# Altium PCB Smart Dustbin.PcbDoc
Units mm, origin at the board's own origin, x right, y up, seen from the top; angles counter-clockwise.
Board outline 56 x 49 mm, 2 copper layers (Top Layer, Bottom Layer), stack 1.1 mm thick; 14 components, 16 nets, 61 pads, 4 vias.
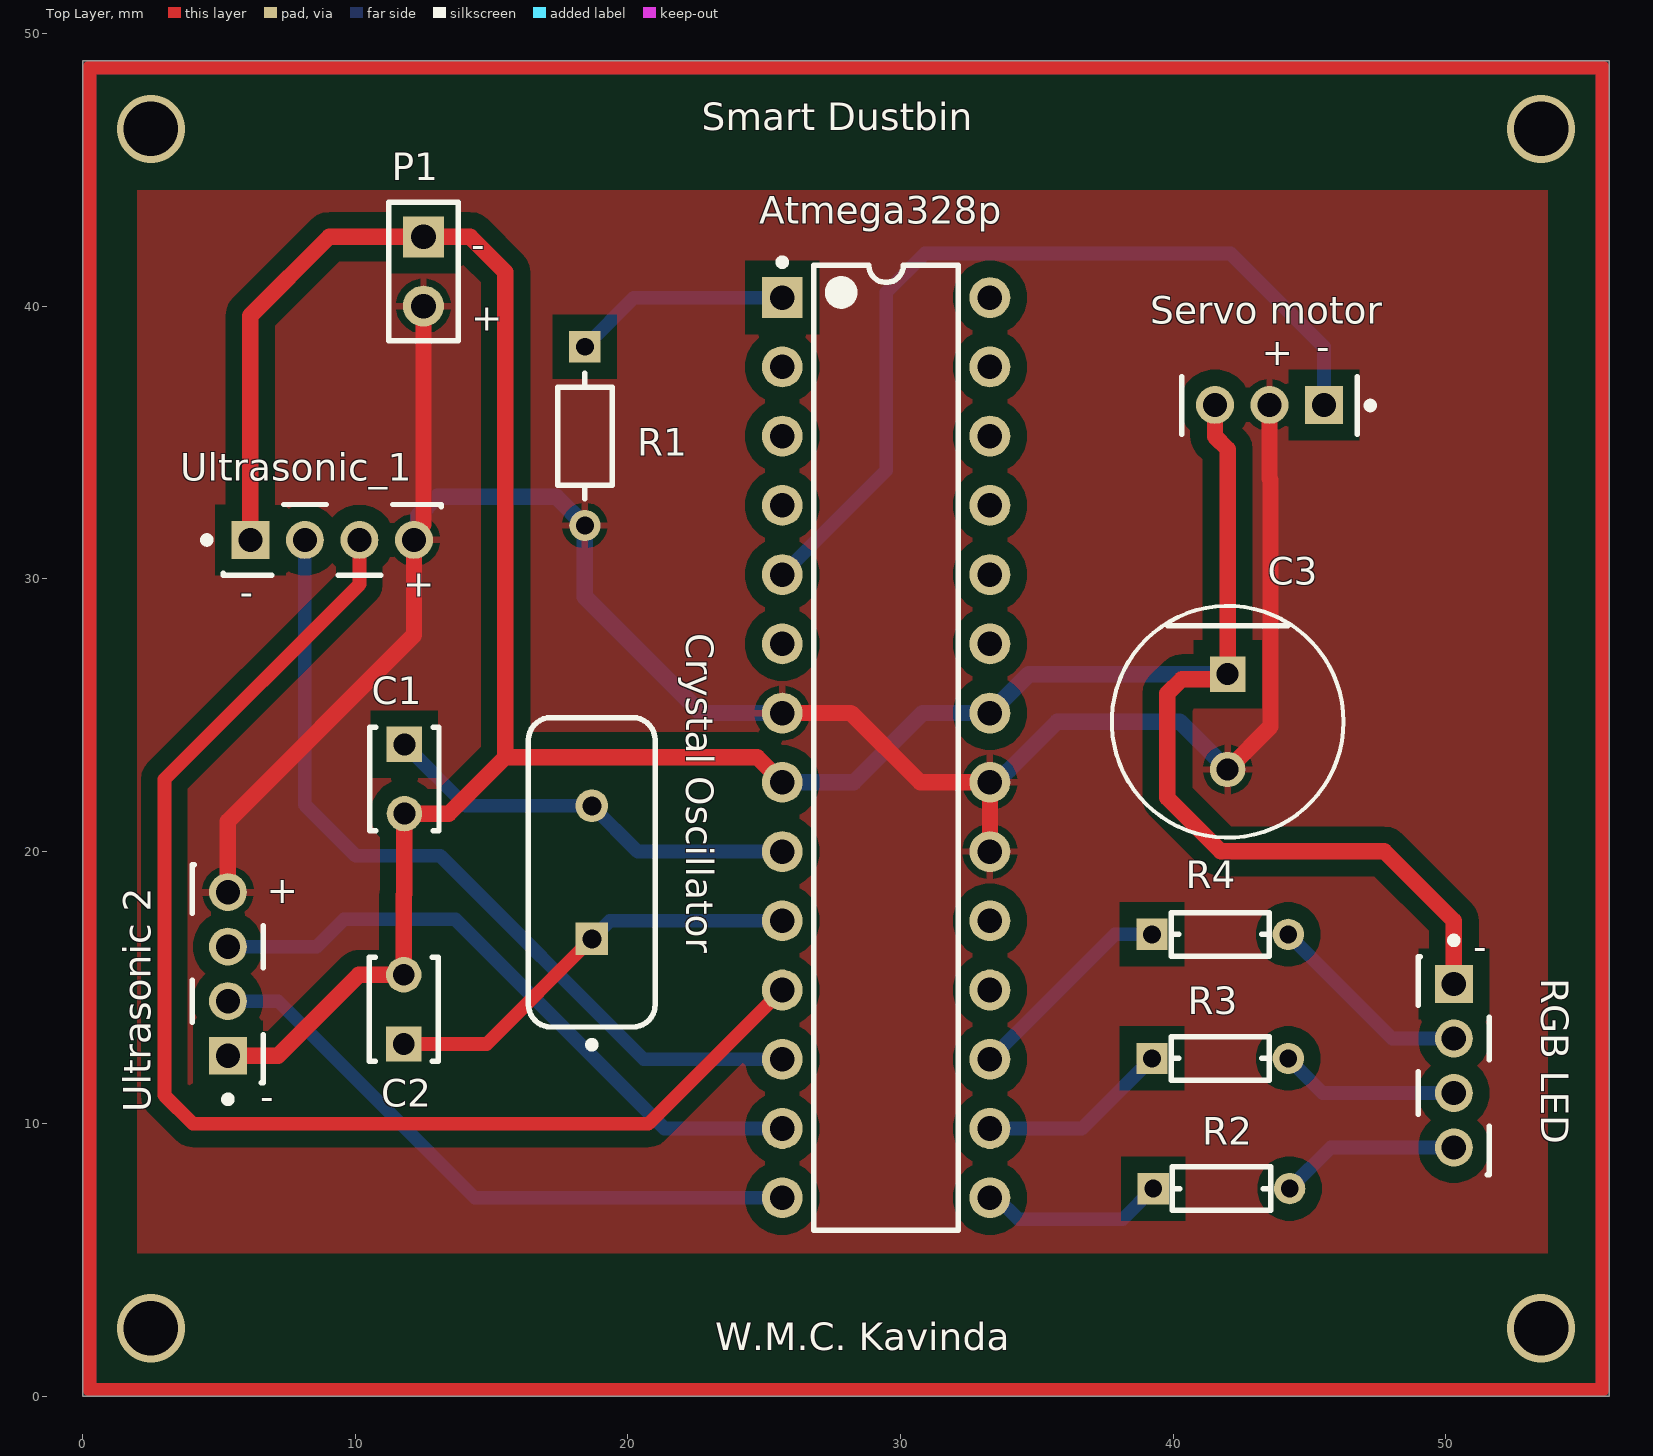
[diagram p0: Top Layer view]
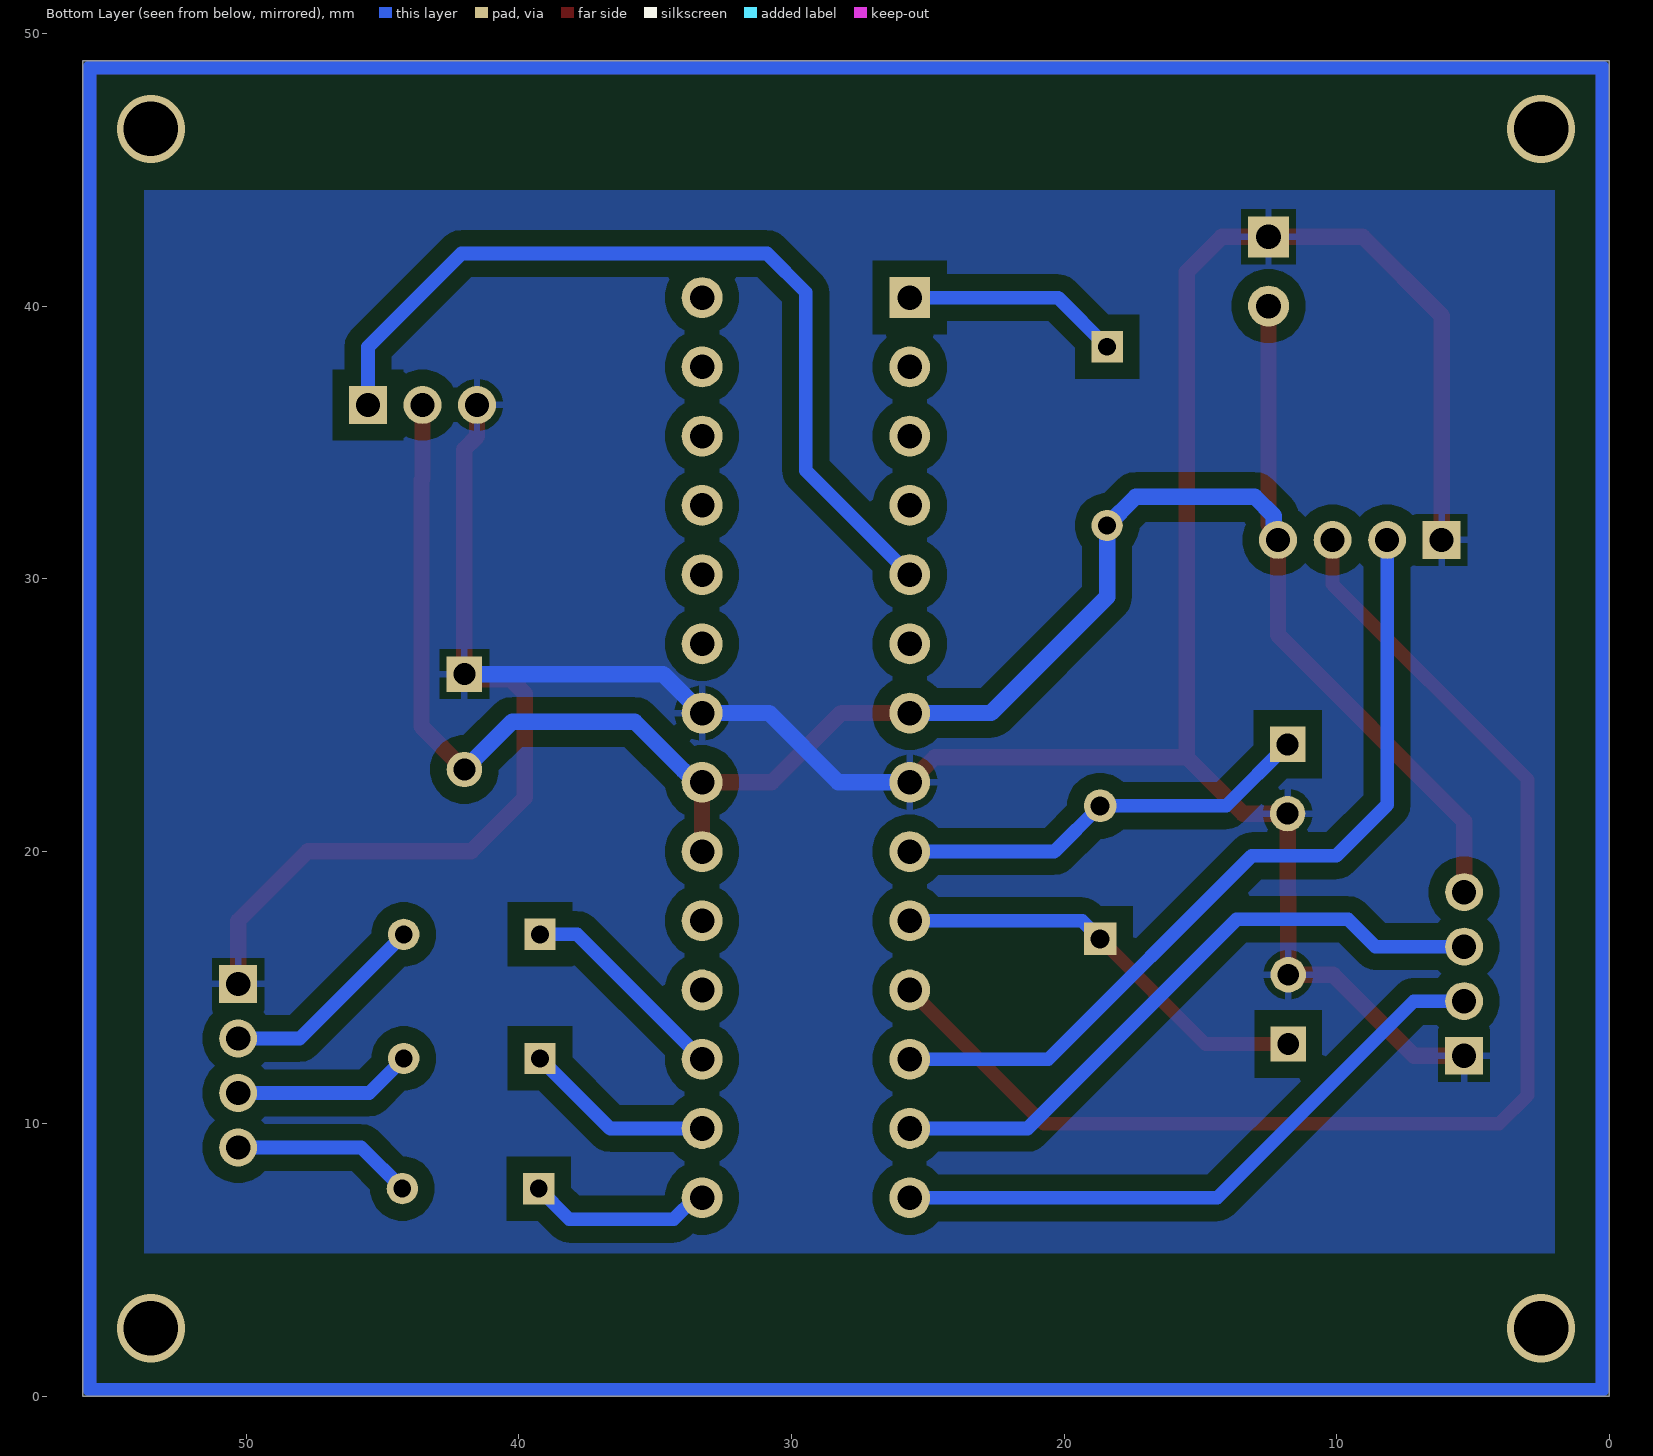
[diagram p1: Bottom Layer view, seen from below]
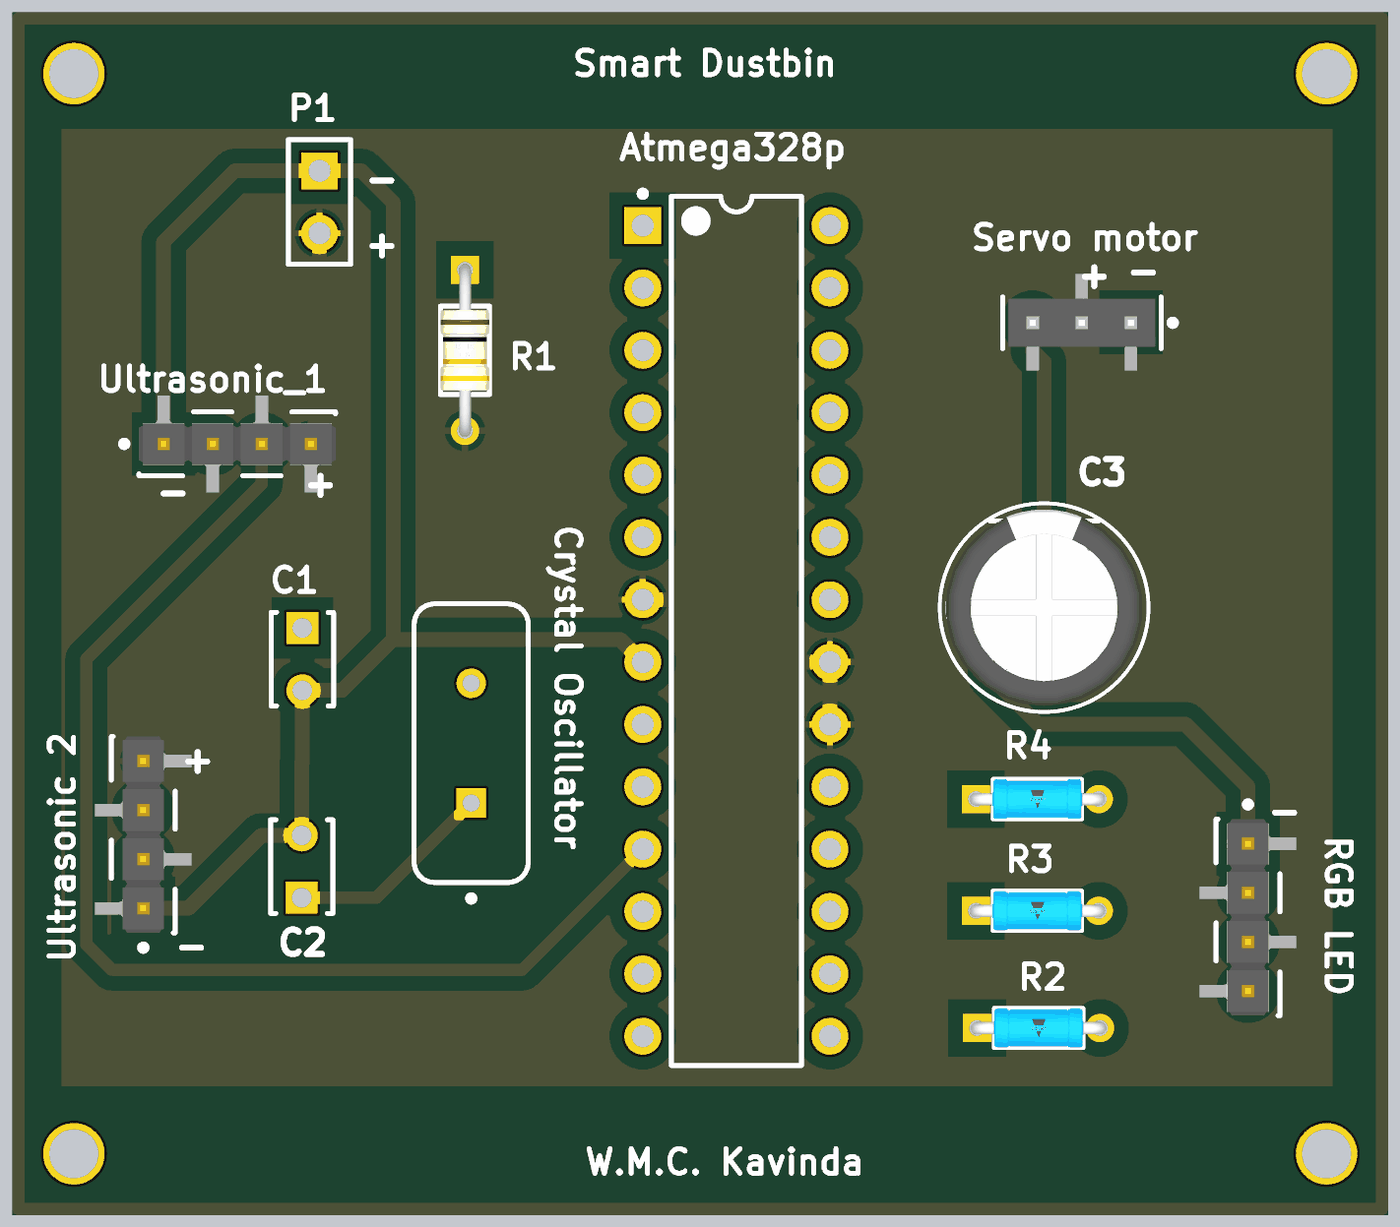
[diagram p2: 3D render of the assembled board from above, using the file's embedded part models]

## Layer stack, top to bottom
Top Solder: solder mask 0.05, SM-001, Dk 4
Top Layer: signal copper 0.1
Dielectric 1: dielectric 0.9, FR-4, Dk 4.8
Bottom Layer: signal copper 0.1
Bottom Solder: solder mask 0.05, SM-001, Dk 4

## Board outline
0,0 56,0 56,49 0,49

## Design rules (kind name [scope] priority, off if disabled: settings)
Clearance [All] p1: gap=0.6 ignorepadtopadclearanceinfootprint=FALSE
PolygonConnect [All] p1: connectstyle=Relief reliefconductorwidth=0.254 reliefentries=4 polygonreliefangle="90 Angle" airgapwidth=0.254
RoutingVias [All] p1: holewidth=0.4 width=0.5 viastyle="Through Hole" minholewidth=0.4 minwidth=0.5 maxholewidth=0.4 maxwidth=0.5
SilkToSolderMaskClearance [IsPad] p1: minsilkscreentomaskgap=0.02 clearancetoexposedcopper=TRUE
SolderMaskExpansion [All] p1: expansion=0.102 istentingtop=FALSE
Width WidthPOW [(InNet('+5') OR InNet('GND'))] p1: maxlimit=1 minlimit=0.2 preferedwidth=0.6
Width [All] p2: maxlimit=1 minlimit=0.1 preferedwidth=0.5
29 further rules are at their usual default settings.

## Components (designator, comment, footprint, x,y, rotation, side; value= is the part's Value field where it differs from the comment)
Atmega328p "ATmega328-PU" 28P3 29.471,23.8 r0 top
C1 "22pF" KEMT-C315-THT-2 11.8,22.65 r270 top
C2 "22pF" KEMT-C315-THT-2 11.775,14.2 r90 top
C3 "10uF" FP-RAD-TH-D_8_0_5-L_11_5-MFG 42,24.75 r270 top
"Crystal Oscillator" "16MHz" FOX-FOXSLF160-20 18.676,19.228 r90 top
P1 "Header 2" HDR1X2 12.5,42.54 r270 top
R1 "10K" FP-CF18-MFG 18.422,35.23 r270 top value=10kΩ
R2 "220Ω" FP-MBA0204-MFG 41.775,7.625 r0 top
R3 "220Ω" FP-MBA0204-MFG 41.725,12.4 r0 top
R4 "220Ω" FP-MBA0204-MFG 41.725,16.95 r0 top
"RGB LED" "TMM-104-01-S-S" FP-TMM-104-01-S-S-MFG 50.299,12.132 r270 top
"Servo motor" "TMM-103-03-T-S" FP-TMM-103-03-T-S-MFG 43.536,36.353 r180 top
"Ultrasonic 2" "TMM-104-01-S-S" FP-TMM-104-01-S-S-MFG 5.325,15.5 r90 top
Ultrasonic_1 "TMM-104-01-S-S" FP-TMM-104-01-S-S-MFG 9.151,31.42 r0 top

## Footprints (in the part's own frame and the unit in brackets; to place one, negate y for a bottom-side part, rotate by r counter-clockwise, add the part's x,y. Pads: shape width x height; smd on the part's side, far side on the other; paste and mask are expansions set on the pad)
28P3 [mm] "28-Pin Plastic Dual In-Line Package (PDIP)"
  rect 1.5x1.5 hole 0.9: 1(-3.81,16.51)
  round 1.5 hole 0.9: 2(-3.81,13.97) 3(-3.81,11.43) 4(-3.81,8.89) 5(-3.81,6.35) 6(-3.81,3.81) 7(-3.81,1.27) 8(-3.81,-1.27) 9(-3.81,-3.81) 10(-3.81,-6.35) 11(-3.81,-8.89) 12(-3.81,-11.43) 13(-3.81,-13.97) 14(-3.81,-16.51) 15(3.81,-16.51) 16(3.81,-13.97) 17(3.81,-11.43) 18(3.81,-8.89) 19(3.81,-6.35) 20(3.81,-3.81) 21(3.81,-1.27) 22(3.81,1.27) 23(3.81,3.81) 24(3.81,6.35) 25(3.81,8.89) 26(3.81,11.43) 27(3.81,13.97) 28(3.81,16.51)
  silkscreen extent -3.93,-17.7 2.65,17.93, body extent -3.6,-17.65 3.6,17.65, height 4.58
FOX-FOXSLF160-20 [mm] "THD, 2-Leads, Body 11.35x4.65mm"
  rect 1.2x1.2 hole 0.7: 1(-2.44,0)
  round 1.2 hole 0.7: 2(2.44,0)
  silkscreen extent -6.45,-2.33 5.68,2.33, body extent -5.67,-2.32 5.68,2.33, height 3.6
FP-CF18-MFG [mm]
  rect 1.15x1.15 hole 0.65 paste-1000 mask+0: 1(-3.28,0)
  round 1.15 hole 0.65 paste-1000 mask+0: 2(3.28,0)
  silkscreen extent -2.31,-1 2.3,1, body extent -3.96,-1.1 3.96,1.1, height 0.25
FP-MBA0204-MFG [mm]
  rect 1.15x1.15 hole 0.65 paste-1000 mask+0: 1(-2.5,0)
  round 1.15 hole 0.65 paste-1000 mask+0: 2(2.5,0)
  silkscreen extent -1.8,-0.8 1.8,0.8, body extent -3.17,-0.9 3.17,0.9, height 0.25
FP-RAD-TH-D_8_0_5-L_11_5-MFG [mm]
  rect 1.3x1.3 hole 0.8 paste-1000 mask+0: 1(-1.75,0)
  round 1.3 hole 0.8 paste-1000 mask+0: 2(1.75,0)
  silkscreen extent -4.25,-4.25 4.25,4.25, body extent -4.35,-4.35 4.35,4.35, height 0.25
FP-TMM-103-03-T-S-MFG [mm]
  rect 1.39x1.39 hole 0.89 paste-1000 mask+0: 1(-2,-0.02)
  round 1.39 hole 0.89 paste-1000 mask+0: 2(0,-0.02) 3(2,-0.02)
  silkscreen extent -3.83,-1.05 3.22,1.05, body extent -3.1,-2.07 3.1,2.07, height 0.25
FP-TMM-104-01-S-S-MFG [mm]
  rect 1.39x1.39 hole 0.89 paste-1000 mask+0: 1(-3,0)
  round 1.39 hole 0.89 paste-1000 mask+0: 2(-1,0) 3(1,0) 4(3,0)
  silkscreen extent -4.72,-1.3 4,1.3, body extent -4.1,-2.07 4.1,2.07, height 0.25
HDR1X2 [mm] "Connector; Header; 2 Position"
  rect 1.5x1.5 hole 0.9: 1(0,0)
  round 1.5 hole 0.9: 2(2.54,0)
  silkscreen extent -1.27,-1.27 3.81,1.27
KEMT-C315-THT-2 [mm] "THD, 2-Leads, Body 3.81x2.54mm"
  rect 1.3x1.3 hole 0.8: 1(-1.27,0)
  round 1.3 hole 0.8: 2(1.27,0)
  silkscreen extent -1.9,-1.27 1.91,1.27, body extent -1.91,-1.27 1.91,1.27, height 4.66

## Part data
Atmega328p: library part CMP-0095-00015-2, "8-bit AVR Microcontroller, 32KB Flash, 1KB EEPROM, 2KB SRAM, 28-pin PDIP, Industrial Grade (-40°C to 85°C)", ComponentLink1Description="Manufacturer URL", ComponentLink1URL=http://www.atmel.com/, ComponentLink2Description="ATmega48A/48PA/88A/88PA/168A/168PA/328/328P Datasheet", ComponentLink2URL=http://www.atmel.com/dyn/resources/prod_documents/8271.pdf, ComponentLink3Description="ATmega48A/48PA/88A/88PA/168A/168PA/328/328P Summary", ComponentLink3URL=http://www.atmel.com/dyn/resources/prod_documents/8271S.pdf, DatasheetVersion="revD, May-2011", PackageDescription="28-lead (0.300\"/7.62mm Wide) Plastic Dual Inline Package (PDIP)", PackageReference=28P3, PackageVersion="revB, Sep-2001", RevisionNote="DatasheetVersion updated. URLs added."
C1 C2: library part CMP-1664-00008-1, "Capacitor, Ceramic, 22 pF, +/-10 %, 100 V, -55 to 125 degC, 2-Pin THD, RoHS, Bulk", Case\Package=TO-220, Max Input Voltage="40 V", Max Operating Temperature="125 degC", Max Ouput Current="1.5 A", Min Input Voltage="4.2 V", Min Operating Temperature="0 degC", Output Voltage="1.2 V", Package Quantity=50, ComponentLink1Description="Manufacturer URL", ComponentLink1URL=http://www.kemet.com/, ComponentLink2Description=Datasheet, ComponentLink2URL=http://capacitoredge.kemet.com/capedge2/DataSheet/Datasheet-C315C220K1G5TA.pdf?pn=C315C220K1G5TA{BULK}, DatasheetVersion=Aug-16, Height="9.28 mm", Length="10.28 mm", Mount="Through Hole", Output Current="1.5 A", Outputs=1, PackageDescription="2-Pin Through Hole Device, Body 3.81 x 2.54 mm", PackageReference=C315-THT-2, Packaging=Rail/Tube, Pins=3, Radiation Hardening=No, REACH SVHC="No SVHC", RoHSCompliant=true, Weight="0.08113 oz", Width="4.82 mm"
C3: library part CMP-05427-000566-1, "Aluminum Electrolytic Capacitors (Radial Lead Type) AEC-Q200 Qualified 10uF ±20% 50V", Case/Package=Radial, ESR (Equivalent Series Resistance)=950mR, Max Operating Temperature=125°C, Min Operating Temperature=-40°C, Package Quantity=200, Ripple Current=180mA, Tolerance=20%, Voltage Rating=50V, Capacitance=10uF, Construction=RADIAL, Diameter=8mm, Height=11.5mm, Height - Seated (Max)=0.492inch, Impedance=950mR, Lead Diameter=0.6mm, Lead Pitch=3.5mm, Length=11.5mm, Life (Hours)=2000Hour, Mount="Through Hole", Number of Pins=2, Packaging=Bulk, Radiation Hardening=No, REACH SVHC="No SVHC", RoHS Compliant=Yes, Series=TA, Termination=Radial, Voltage Rating (DC)=50V
"Crystal Oscillator": library part CMP-1749-00003-1, "Resistance Weld Thru-Hole Crystal, 16 MHz, -20 to 70 degC, 2-Pin THD, RoHS, Bulk", Case\Package=Axial, Max Operating Temperature="155 degC", Min Operating Temperature="-55 degC", Package Quantity=200, Power Rating="250 mW", Resistance="221 kohm", Tolerance=1%, Voltage Rating="250 V", ComponentLink1Description="Manufacturer URL", ComponentLink1URL=http://www.foxonline.com/, ComponentLink2Description=Datasheet, ComponentLink2URL=http://www.foxonline.com/pdfs/hc49slf.pdf, DatasheetVersion=Mar-15, Length="0.248 inch", Mount="Through Hole", PackageDescription="2-Pin Through Hole Device, Body 11.35 x 4.65 mm", PackageReference=FOXSLF160-20, Packaging=Bulk, RoHSCompliant=true
P1: "Header, 2-Pin", LatestRevisionDate=17-Jul-2002, LatestRevisionNote="Re-released for DXP Platform.", Publisher="Altium Limited"
R1: library part CMP-26528-000002-1, "RES 10K OHM 1/8W 5% CF AXIAL", Manufacturer="Stackpole Electronics", Manufacturer Part Number=CF18JT10K0, Package=CF18, Power Rating=0.125W, Resistance=10kΩ, Temperature="-55°C to +155°C", Temperature Coefficient=0-500ppm/°C, Temperature Range High=+155°C, Temperature Range Low=-55°C, Tolerance=5%, Voltage Rating=250V, Automotive=No, Category=Res, ComponentLink2Description=Datasheet, ComponentLink2URL=http://www.seielect.com/Catalog/SEI-CF_CFM.pdf, Composition="Carbon Film", Device Class L1="Passive Components", Device Class L2=Resistors, Device Class L3="Through-Hole Resistors", Digikey Description="RES 10K OHM 1/8W 5% CF AXIAL", Height=2mm, Ipc Land Pattern Name=RESAD656W65L360D200, Lead Free=Yes, Octopart=https://octopart.com/cf18jt10k0-stackpole+electronics-19205642, RoHS=TRUE, Series=CF
R2 R3 R4: library part CMP-02408-000005-1, "RES 220 OHM 0.4W 1% AXIAL", Manufacturer="Vishay BC Components", Manufacturer Part Number=MBA02040C2200FC100, Package=MBA0204, Power Rating=0.25W, Temperature="-55°C to +125°C", Temperature Coefficient=50ppm/°C, Temperature Range High=+125°C, Temperature Range Low=-55°C, Tolerance=1%, Voltage Rating=200V, Automotive=Yes, Automotive Grade="Grade 1", Category=Res, ComponentLink2Description=Datasheet, ComponentLink2URL=http://www.vishay.com/docs/28766/mbxsma.pdf, Composition="Metal Film", Device Class L1="Passive Components", Device Class L2=Resistors, Device Class L3="Through-Hole Resistors", Digikey Description="RES 220 OHM 0.4W 1% AXIAL", Height=1.6mm, Ipc Land Pattern Name=RESAD500W65L360D160, Lead Free=Yes, Mouser Description="Thin Film Resistors - Through Hole .4watt 220ohms 1% 1/8watt body size", Octopart=https://octopart.com/mba02040c2200fc100-vishay-43743094, Resistance=220Ω, RoHS=TRUE, Series="MBA/SMA 0204"
"RGB LED" "Ultrasonic 2" Ultrasonic_1: library part CMP-02766-001674-1, "CONN HEADER VERT 4POS 2MM", Color=Black, Max Current Rating=3.9A, Max Operating Temperature=125°C, Max Voltage Rating (AC)=500V, Min Operating Temperature=-55°C, Package Quantity=1, Connector Type="Male Pin", Contact Material=Bronze, Contact Mating Length=0.126inch, Contact Plating=Gold, Contact Type="Male Pin", Depth=1.97mm, Gender=Male, Housing Color=Black, Housing Material=Polymer, Lead Free="Lead Free", Length=8mm, Mount="Through Hole", Number of Contacts=4, Number of Positions=4, Number of Rows=1, Orientation=Straight, Packaging=Bulk, Pitch=2mm, Radiation Hardening=No, RoHS Compliant=Yes, Series="FleXYZ™ TMM", Termination=Solder, Width=1.97mm
"Servo motor": library part CMP-02766-001695-1, "CONN HEADER VERT 3POS 2MM", Color=Black, Max Current Rating=3.9A, Max Operating Temperature=105°C, Max Voltage Rating (AC)=500V, Min Operating Temperature=-55°C, Package Quantity=1, Connector Type=Header, Contact Finish - Mating=TIN, Contact Material=Bronze, Contact Mating Length=0.157inch, Contact Plating=Tin, Contact Shape=Square, Contact Type="Male Pin", Depth=1.97mm, Fastening Type=Pull, Gender=Male, Housing Color=Black, Housing Material=Polymer, Insulation Color=Black, Insulation Material=Polymer, Lead Free="Lead Free", Length=6mm, Mount="Through Hole", Number of Contacts=3, Number of Positions=3, Number of Rows=1, Orientation=Straight, Packaging=Bulk, Pitch=2mm, Radiation Hardening=No, REACH SVHC="No SVHC", RoHS Compliant=Yes, Series=TMM, Termination=Solder

## Via types
v1: diameter 2.5, hole 2, Top Layer to Bottom Layer, 4 vias

## Nets (pads, with @x,y where several pads share a name; then routed paths per layer and width w, separated by ;. In a path a pad name is that pad's centre, name@x,y a point inside that pad or via, vN(x,y) a via of type N, cw(c..) or ccw(c..) an arc to the next point about the centre after c; other vN are vias at no path point)
+5: "Servo motor.2" "Ultrasonic 2.4" Atmega328p.7 Atmega328p.20 Atmega328p.21 C3.2 P1.2 R1.2 Ultrasonic_1.4 | length 79.5
  Top Layer w0.6: 5.325,18.5 5.325,21.104 12.151,27.93 12.151,31.634 12.5,31.983 P1.2 ; Atmega328p.7 28.18,25.07 30.72,22.53 Atmega328p.21 Atmega328p.20 ; C3.2 43.575,24.575 43.575,33.623 43.536,33.662 43.536,36.373
  Bottom Layer w0.6: Ultrasonic_1.4 12.302,31.571 12.302,32.302 13,33 17.372,33 R1.2 18.422,29.328 22.68,25.07 Atmega328p.7 ; Atmega328p.21 33.525,22.53 33.967,22.972 33.972,22.972 35.75,24.75 40.25,24.75 C3.2
GND: "RGB LED.1" "Servo motor.3" "Ultrasonic 2.1" Atmega328p.8 Atmega328p.22 C1.2 C2.2 C3.1 P1.1 Ultrasonic_1.1 | length 114.9
  Top Layer w0.6: 5.325,12.5 7.161,12.5 10.131,15.47 C2.2 11.775,18.409 11.8,18.434 C1.2 13.428,21.38 15.5,23.452 ; Ultrasonic_1.1 6.151,39.651 9.04,42.54 P1.1 14.21,42.54 15.5,41.25 15.5,23.452 ; Atmega328p.8 24.739,23.452 15.5,23.452 ; 41.536,36.373 41.536,35.214 42,34.75 C3.1 41.814,26.314 40.314,26.314 39.79,25.79 39.79,21.96 41.75,20 47.75,20 50.299,17.451 50.299,15.132
  Bottom Layer w0.6: Atmega328p.8 28.28,22.53 30.82,25.07 Atmega328p.22 34.711,26.5 C3.1
NetAtmega328p_1: Atmega328p.1 R1.1 | length 8
  Bottom Layer w0.5: R1.1 20.222,40.31 Atmega328p.1
NetAtmega328p_5: "Servo motor.1" Atmega328p.5 | length 32.1
  Bottom Layer w0.5: Atmega328p.5 29.478,33.967 29.478,40.507 30.9,41.929 42.107,41.929 45.536,38.5 45.536,36.373
NetAtmega328p_9: "Crystal Oscillator.2" Atmega328p.9 C1.1 | length 15.5
  Bottom Layer w0.5: C1.1 14.052,21.668 18.676,21.668 20.354,19.99 Atmega328p.9
NetAtmega328p_10: "Crystal Oscillator.1" Atmega328p.10 C2.1 | length 15.8
  Top Layer w0.5: C2.1 14.818,12.93 18.676,16.788
  Bottom Layer w0.5: 18.676,16.788 19.338,17.45 Atmega328p.10
NetAtmega328p_11: Atmega328p.11 Ultrasonic_1.3 | length 48.5
  Top Layer w0.5: Ultrasonic_1.3 10.151,29.791 3,22.64 3,11.043 4.043,10 20.751,10 Atmega328p.11
NetAtmega328p_12: Atmega328p.12 Ultrasonic_1.2 | length 31.1
  Bottom Layer w0.5: Ultrasonic_1.2 8.151,21.701 10.021,19.831 13.12,19.831 20.581,12.37 Atmega328p.12
NetAtmega328p_13: "Ultrasonic 2.3" Atmega328p.13 | length 23.9
  Bottom Layer w0.5: 5.325,16.5 8.573,16.5 9.573,17.5 13.673,17.5 21.343,9.83 Atmega328p.13
NetAtmega328p_14: "Ultrasonic 2.2" Atmega328p.14 | length 23.3
  Bottom Layer w0.5: 5.325,14.5 7.173,14.5 14.383,7.29 Atmega328p.14
NetAtmega328p_15: Atmega328p.15 R2.1 | length 6.8
  Bottom Layer w0.5: Atmega328p.15 33.534,7.29 34.324,6.5 38.15,6.5 R2.1
NetAtmega328p_16: Atmega328p.16 R3.1 | length 7
  Bottom Layer w0.5: Atmega328p.16 36.655,9.83 R3.1
NetAtmega328p_17: Atmega328p.17 R4.1 | length 7.8
  Bottom Layer w0.5: Atmega328p.17 37.861,16.95 R4.1
NetR2_2: "RGB LED.4" R2.2 | length 6.6
  Bottom Layer w0.5: R2.2 45.782,9.132 50.299,9.132
NetR3_2: "RGB LED.3" R3.2 | length 6.6
  Bottom Layer w0.5: R3.2 45.493,11.132 50.299,11.132
NetR4_2: "RGB LED.2" R4.2 | length 7.7
  Bottom Layer w0.5: R4.2 48.043,13.132 50.299,13.132
pads on no net: Atmega328p.2 Atmega328p.3 Atmega328p.4 Atmega328p.6 Atmega328p.18 Atmega328p.19 Atmega328p.23 Atmega328p.24 Atmega328p.25 Atmega328p.26 Atmega328p.27 Atmega328p.28
copper on no net: | length 416
  Top Layer w0.5: 0.25,0.25 55.75,0.25 55.75,48.75 0.25,48.75 0.25,0.25
  Bottom Layer w0.5: 0.25,0.25 55.75,0.25 55.75,48.75 0.25,48.75 0.25,0.25
  other v1: 2.5,2.5 53.5,2.5 2.5,46.5 53.5,46.5

## Polygon pours and split planes (outlines as drawn)
GND on Bottom Layer "GND_L02_P001" (solid, remove dead copper, pour order 1): 2,5.25 53.75,5.25 53.75,44.25 2,44.25
+5 on Top Layer "+5_L01_P004" (solid, remove dead copper, pour order 4): 2,5.25 53.75,5.25 53.75,44.25 2,44.25

## Silkscreen, mask and mechanical layers (free items; w line width, h text height)
Top Overlay:
  text "Smart Dustbin" at 22.7,46.45 h1
  text "-" at 14.254,41.754 h1
  text "+" at 14.254,39.087 h1
  text "-" at 45.254,38.004 h1
  text "+" at 43.254,37.837 h1
  text "+" at 11.754,29.337 h1
  text "-" at 5.754,29.004 h1
  text "+" at 6.754,18.087 h1
  text "-" at 51.004,16.004 h1
  text "-" at 6.504,10.504 h1
  text "W.M.C. Kavinda" at 23.2,1.7 h1
Mechanical 1:
  the board outline again, w0.254